# Altium PCB USBHUB-FS1.1S-PCB.PcbDoc
Units mil, origin at the board's own origin, x right, y up, seen from the top; angles counter-clockwise.
Board outline not stored, 2 copper layers (Top Layer, Bottom Layer); 14 components, 0 nets, 56 pads, 0 vias.
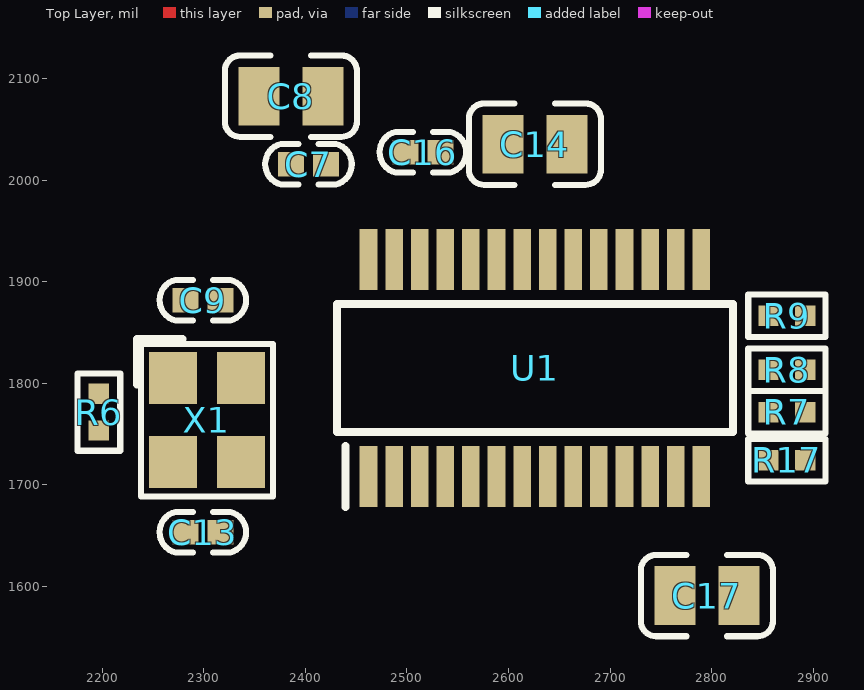
[diagram p0: Top Layer view]
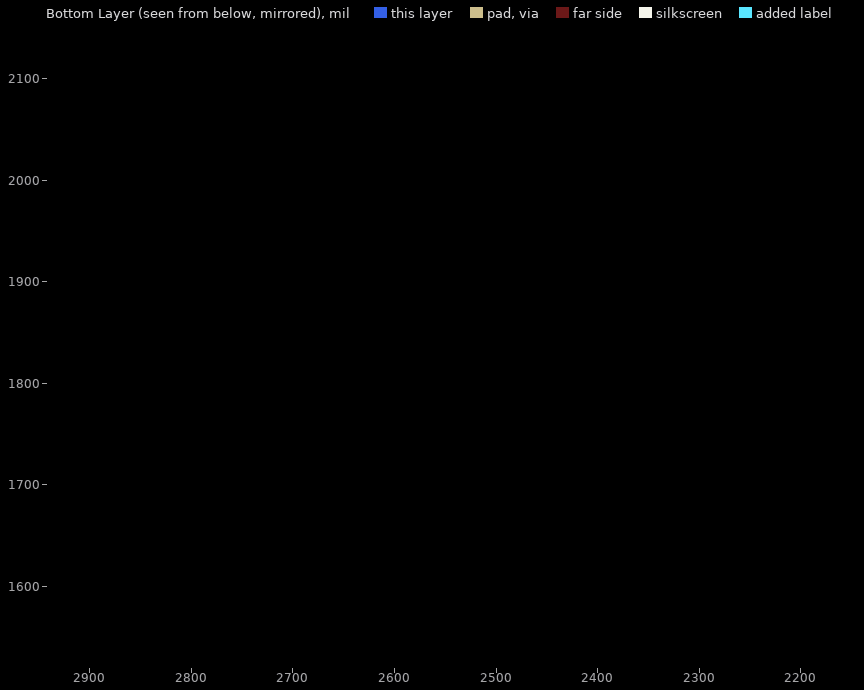
[diagram p1: Bottom Layer view, seen from below]

## Layer stack, top to bottom
Top Solder: solder mask 0.4, Solder Resist, Dk 3.5
Top Layer: signal copper 1.4
Dielectric 1: dielectric 12.6, FR-4, Dk 4.8
Bottom Layer: signal copper 1.4
Bottom Solder: solder mask 0.4, Solder Resist, Dk 3.5

## Components (designator, comment, footprint, x,y, rotation, side; value= is the part's Value field where it differs from the comment)
C7 "100nF 16V" 0402C 2403.15,2015.75 r180 top
C8 "10uF 25V" 0805C 2385.83,2082.68 r0 top
C9 "20pF" 0402C 2299.21,1881.89 r0 top
C13 "20pF" 0402C 2299.21,1653.54 r0 top
C14 "10uF 25V" 0805C 2625.98,2035.43 r0 top
C16 "100nF 16V" 0402C 2515.75,2027.56 r180 top
C17 "10uF 25V" 0805C 2795.28,1591.1 r0 top
R6 "1M" 0402R 2196.85,1771.65 r90 top
R7 "100K" 0402R 2874.02,1771.65 r0 top
R8 "100K" 0402R 2874.02,1813.39 r0 top
R9 "100K" 0402R 2874.02,1866.53 r0 top
R17 "2.7K" 0402R 2874.02,1724.41 r180 top
U1 "FE1.1S" SOP64P600X175-28N 2625.98,1814.96 r90 top
X1 "12Mhz" "OSC 3225-4P" 2303.15,1763.78 r270 top

## Footprints (in the part's own frame and the unit in brackets; to place one, negate y for a bottom-side part, rotate by r counter-clockwise, add the part's x,y. Pads: shape width x height; smd on the part's side, far side on the other; paste and mask are expansions set on the pad)
0402C [mm]
  rect 0.65x0.62 smd: 1(-0.44,0) 2(0.44,0)
  silkscreen extent -1.08,-0.51 1.08,0.51, body extent -0.51,-0.27 0.49,0.27, height 0.55
0402R [mil]
  rect 20x20 smd: 1(-18,0) 2(18,0)
  silkscreen extent -38,-21 38,21, body extent -20,-11 20,11, height 16
0805C [mm]
  rect 1.02x1.47 smd: 1(-0.8,0) 2(0.8,0)
  silkscreen extent -1.65,-1.02 1.65,1.02, body extent -1,-0.62 1,0.63, height 0.88
"OSC 3225-4P" [mm]
  rect 1.3x1.2 smd: 1(-1.05,-0.85) 2(1.05,-0.85) 3(1.05,0.85) 4(-1.05,0.85)
  silkscreen extent -2.03,-1.75 1.91,1.65, body extent -1.47,-1.27 1.73,1.23, height 0.7
SOP64P600X175-28N [mm]
  rect 1.525x0.44 smd: 1(-2.712,4.16) 2(-2.712,3.52) 3(-2.712,2.88) 4(-2.712,2.24) 5(-2.712,1.6) 6(-2.712,0.96) 7(-2.712,0.32) 8(-2.712,-0.32) 9(-2.712,-0.96) 10(-2.712,-1.6) 11(-2.712,-2.24) 12(-2.712,-2.88) 13(-2.712,-3.52) 14(-2.712,-4.16) 15(2.712,-4.16) 16(2.712,-3.52) 17(2.712,-2.88) 18(2.712,-2.24) 19(2.712,-1.6) 20(2.712,-0.96) 21(2.712,-0.32) 22(2.712,0.32) 23(2.712,0.96) 24(2.712,1.6) 25(2.712,2.24) 26(2.712,2.88) 27(2.712,3.52) 28(2.712,4.16)
  silkscreen extent -3.47,-4.95 1.6,4.95, body extent -3,-4.95 3,4.95, height 1.75

## Part data
C7 C8 C14 C16 C17: library part CAP-NP, "CAP-NP"
C9 C13: library part CAP-NP
R6 R7 R8 R9 R17: library part RES
U1: "Integrated Circuit", Manufacturer_Name="JFD IC", Datasheet Link=https://cdn-shop.adafruit.com/product-files/2991/FE1.1s+Data+Sheet+(Rev.+1.0).pdf, Height=1.75mm, Manufacturer_Part_Number=FE1.1S
X1: library part XTAL-4P, "XTAL-4P"

## Nets (pads, with @x,y where several pads share a name; then routed paths per layer and width w, separated by ;. In a path a pad name is that pad's centre, name@x,y a point inside that pad or via, vN(x,y) a via of type N, cw(c..) or ccw(c..) an arc to the next point about the centre after c; other vN are vias at no path point)
pads on no net: C7.1 C7.2 C8.1 C8.2 C9.1 C9.2 C13.1 C13.2 C14.1 C14.2 C16.1 C16.2 C17.1 C17.2 R6.1 R6.2 R7.1 R7.2 R8.1 R8.2 R9.1 R9.2 R17.1 R17.2 U1.1 U1.2 U1.3 U1.4 U1.5 U1.6 U1.7 U1.8 U1.9 U1.10 U1.11 U1.12 U1.13 U1.14 U1.15 U1.16 U1.17 U1.18 U1.19 U1.20 U1.21 U1.22 U1.23 U1.24 U1.25 U1.26 U1.27 U1.28 X1.1 X1.2 X1.3 X1.4